# Altium PCB JSB_PCB.PcbDoc
Units mm, origin at the board's own origin, x right, y up, seen from the top; angles counter-clockwise.
Board outline 95.1 x 24.6 mm, 2 copper layers (Top Layer, Bottom Layer), stack 1.671 mm thick; 10 components, 11 nets, 28 pads, 163 vias.
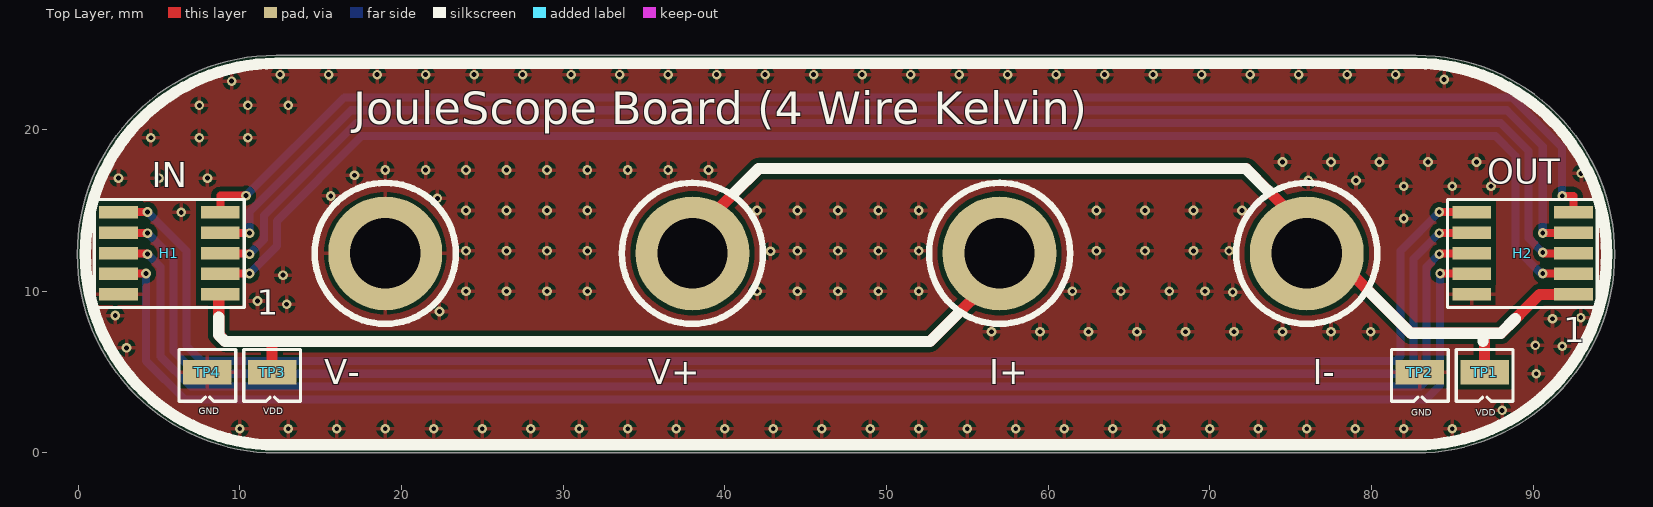
[diagram p0: Top Layer view]
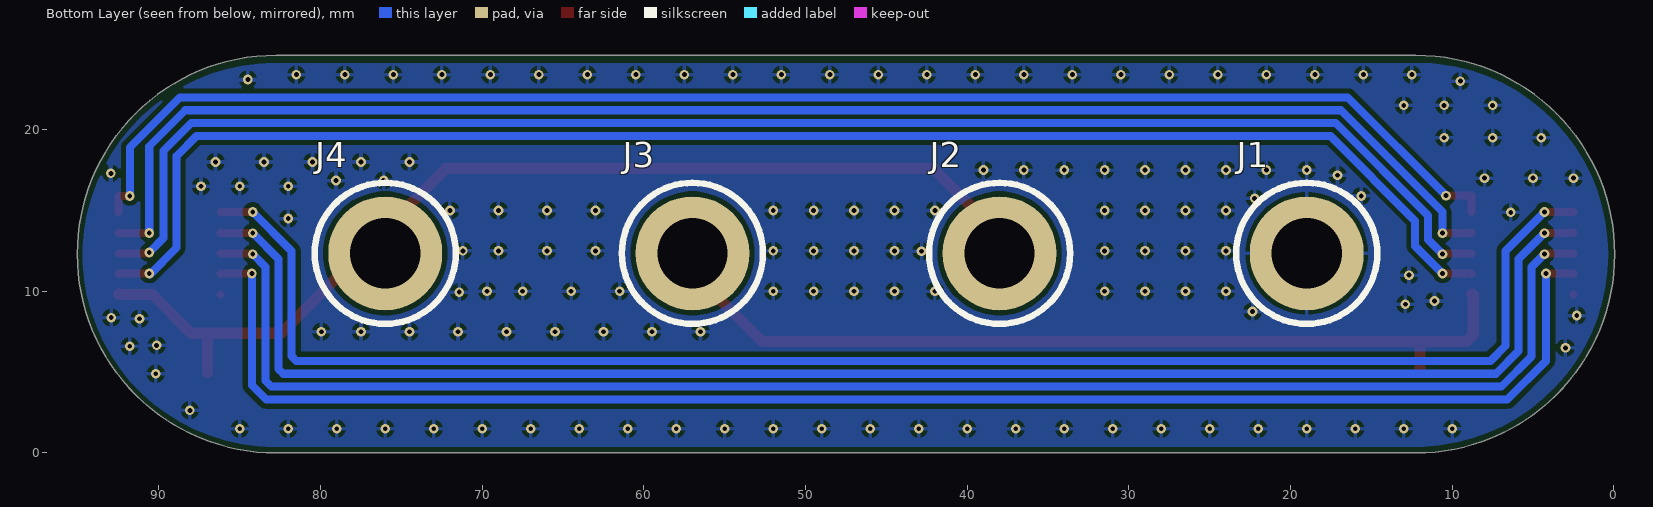
[diagram p1: Bottom Layer view, seen from below]

## Layer stack, top to bottom
Top Solder: solder mask 0.0102, Solder Resist, Dk 3.5
Top Layer: signal copper 0.0356
Dielectric 1: dielectric 1.6, FR-4, Dk 4.8
Bottom Layer: signal copper 0.0356
Bottom Solder: solder mask 0.0102, Solder Resist, Dk 3.5

## Board outline
12.25,0 82.75,0 ccw(c82.75,12.3) 82.75,24.6 12.25,24.6 ccw(c12.25,12.3)

## Design rules (kind name [scope] priority, off if disabled: settings)
Clearance [All] p1: gap=0.3 ignorepadtopadclearanceinfootprint=FALSE
PolygonConnect [All] p1: connectstyle=Relief reliefconductorwidth=0.254 reliefentries=4 polygonreliefangle="90 Angle" airgapwidth=0.254
RoutingVias [All] p1: holewidth=0.3 width=0.6 viastyle="Through Hole" minholewidth=0.3 minwidth=0.6 maxholewidth=0.3 maxwidth=0.6
SilkToSolderMaskClearance [IsPad] p1: minsilkscreentomaskgap=0.1 clearancetoexposedcopper=TRUE
SolderMaskExpansion [All] p1: expansion=0.102 istentingtop=FALSE
Width [All] p1: maxlimit=1 minlimit=0.3 preferedwidth=0.5
29 further rules are at their usual default settings.

## Components (designator, comment, footprint, x,y, rotation, side; value= is the part's Value field where it differs from the comment)
H1 "10pin Header" 20021121 5.65,12.35 r180 top locked
H2 "10pin Header" 20021121 89.35,12.35 r180 top locked
J1 "V-" 654 19,12.35 r180 bottom
J2 "V+" 654 38,12.35 r180 bottom
J3 "I+" 654 57,12.35 r180 bottom locked
J4 "I-" 654 76,12.35 r180 bottom
TP1 "Red TP" 5190TR 87,5 r0 top locked
TP2 "Black TP" 5191TR 83,5 r0 top locked
TP3 "Red TP" 5190TR 12,5 r0 top locked
TP4 "Black TP" 5191TR 8,5 r0 top locked

## Footprints (in the part's own frame and the unit in brackets; to place one, negate y for a bottom-side part, rotate by r counter-clockwise, add the part's x,y. Pads: shape width x height; smd on the part's side, far side on the other; paste and mask are expansions set on the pad)
654 [mm]
  round 7.05 hole 4.35: 1(0,0)
  silkscreen extent -4.36,-4.36 4.36,4.36, body extent -2.81,-3.25 2.73,3.15, height 20.09
5190TR [mm] "RED SMD Test Point"
  rect 3x1.5 smd: 1(0,0)
  silkscreen extent -1.75,-1.8 1.75,1.4, body extent -1.25,-1.47 1.25,1.53, height 2.51
5191TR [mm] "Black SMD Test Point"
  rect 3x1.5 smd: 1(0,0)
  silkscreen extent -1.75,-1.8 1.75,1.4, body extent -1.25,-1.5 1.25,1.5, height 2.51
20021121 [mm] "10 Pin header"
  rect 2.4x0.76 smd: 1(-3.15,2.54) 2(3.15,2.54) 3(-3.15,1.27) 4(3.15,1.27) 5(-3.15,0) 6(3.15,0) 7(-3.15,-1.27) 8(3.15,-1.27) 9(-3.15,-2.54) 10(3.15,-2.54)
  silkscreen extent -4.62,-3.32 4.65,3.35, body extent -2.78,-3.18 2.72,3.18, height 4.56

## Part data
H1 H2: library part 20021121-00010C4LF, "10 Pin Mini Header", Manufacturer="Amphenol ICC / FCI", Supplier Part Number=609-3695-1-ND, Category="Headers and Wire Housings", ComponentLink1Description=https://datasheet.ciiva.com/11749/0900766b8118d62a-11749057.pdf?src-supplier=Rs, ComponentLink1URL=https://datasheet.ciiva.com/11749/0900766b8118d62a-11749057.pdf?src-supplier=Rs, Manufacturer Part Number=20021121-00010C4LF, Pricing="1=0,99, 10=0,839, 100=0,7533 (USD)", RoHS=No, Stock=137144, Supplier=Digi-Key
J1 J2 J3 J4: library part 654, "CONN BANANA PLUG THRD", Manufacturer="Keystone Electronics", Supplier Part Number=36-654-ND, Category=Connectors, ComponentLink1Description=https://datasheet.ciiva.com:443/pdfs/VipMasterIC/IC/KEYC/KEYCS00181/KEYCS00191-1.pdf?src-supplier=IHS+Markit, ComponentLink1URL=https://datasheet.ciiva.com:443/pdfs/VipMasterIC/IC/KEYC/KEYCS00181/KEYCS00191-1.pdf?src-supplier=IHS+Markit, ComponentLink2Description=http://mail.keyelco.com/ENG._DEPT/PDF%20CAT%20NO%20Drawings/654.pdf?src-supplier=Digi-Key, ComponentLink2URL=http://mail.keyelco.com/ENG._DEPT/PDF%20CAT%20NO%20Drawings/654.pdf?src-supplier=Digi-Key, ComponentLink3Description=http://keyelco.com/userAssets/file/M65p110.pdf?src-supplier=Digi-Key, ComponentLink3URL=http://keyelco.com/userAssets/file/M65p110.pdf?src-supplier=Digi-Key, Connector Type="Interconnection Device", Manufacturer Part Number=654, Pricing="1=2,73, 25=2,3996, 100=2,1816, 250=1,98876, 500=1,85436, 1000=1,58166, 2500=1,47258 (USD)", Reach SVHC Compliant=Yes, RoHS=Yes, RoHS Compliant=Yes, Stock=4200, Supplier=Digi-Key
TP1 TP3: library part 5190TR, "RED SMD Test Point", Manufacturer="Keystone Electronics", Supplier Part Number=36-5190CT-ND, Category=Connectors, ComponentLink1Description=https://www.keyelco.com/product-pdf.cfm?p=14478&src-supplier=Digi-Key, ComponentLink1URL=https://www.keyelco.com/product-pdf.cfm?p=14478&src-supplier=Digi-Key, Manufacturer Part Number=5190TR, Pricing="1=0,42, 10=0,401, 25=0,3436, 50=0,292, 100=0,2806, 250=0,25196, 500=0,24052 (USD)", RoHS=Yes, Stock=241676, Supplier=Digi-Key
TP2 TP4: library part 5191TR, "BLACK SMD Test Point", Manufacturer="Keystone Electronics", Supplier Part Number=36-5191CT-ND, Category=Connectors, Manufacturer Part Number=5191TR, Pricing="1=0,42, 10=0,401, 25=0,3436, 50=0,292, 100=0,2806, 250=0,25196, 500=0,24052 (USD)", RoHS=Yes, RoHS Compliant=Yes, Stock=118911, Supplier=Digi-Key

## Via types
v1: diameter 0.6, hole 0.3, Top Layer to Bottom Layer, tented both sides, 163 vias

## Nets (pads, with @x,y where several pads share a name; then routed paths per layer and width w, separated by ;. In a path a pad name is that pad's centre, name@x,y a point inside that pad or via, vN(x,y) a via of type N, cw(c..) or ccw(c..) an arc to the next point about the centre after c; other vN are vias at no path point)
GND: H1.2 H2.2 J1.1 TP2.1 TP4.1 | length 0
  other v1: 10,1.5 13,1.5 16,1.5 19,1.5 22,1.5 25,1.5 28,1.5 31,1.5 34,1.5 37,1.5 40,1.5 43,1.5 46,1.5 49,1.5 52,1.5 55,1.5 58,1.5 61,1.5 64,1.5 67,1.5 70,1.5 73,1.5 76,1.5 79,1.5 82,1.5 85,1.5 88.084,2.637 90.2,4.9 3,6.5 91.8,6.6 90.139,6.657 56.5,7.5 59.5,7.5 62.5,7.5 65.5,7.5 68.5,7.5 71.5,7.5 74.5,7.5 77.5,7.5 79.953,7.5 91.2,8.3 92.953,8.373 2.3,8.5 22.35,8.75 12.9,9.2 11.1,9.4 71.425,9.95 24,10 26.5,10 29,10 31.5,10 42,10 44.5,10 47,10 49.5,10 52,10 61.5,10 64.5,10 67.5,10 69.7,10 12.674,11 42.825,12.475 24,12.5 26.5,12.5 29,12.5 31.5,12.5 44.5,12.5 47,12.5 49.5,12.5 52,12.5 63,12.5 66,12.5 69,12.5 71.2,12.5 82,14.5 6.384,14.885 24,15 26.5,15 29,15 31.5,15 42,15 44.5,15 47,15 49.5,15 52,15 63,15 66,15 69,15 72,15 22.225,15.75 15.625,15.9 82,16.5 85,16.5 87.4,16.5 76.099,16.862 79.049,16.849 2.5,17 5,17 8,17 17.1,17.175 92.973,17.295 19,17.5 21.5,17.5 24,17.5 26.5,17.5 29,17.5 31.5,17.5 34,17.5 36.5,17.5 39,17.5 74.5,18 77.5,18 80.5,18 83.5,18 86.5,18 4.5,19.5 7.5,19.5 10.5,19.5 7.5,21.5 10.5,21.5 13,21.5 9.5,23 84.5,23.1 12.5,23.4 15.5,23.4 18.5,23.4 21.5,23.4 24.5,23.4 27.5,23.4 30.5,23.4 33.5,23.4 36.5,23.4 39.5,23.4 42.5,23.4 45.5,23.4 48.5,23.4 51.5,23.4 54.5,23.4 57.5,23.4 60.5,23.4 63.5,23.4 66.5,23.4 69.5,23.4 72.5,23.4 75.5,23.4 78.5,23.4 81.5,23.4
PTI_DATA: H1.10 H2.10 | length 98.6
  Top Layer w0.5: H1.10 2.505,14.895 4.295,14.895 v1(4.3,14.9) ; v1(84.2,14.9) 84.205,14.895 86.195,14.895 H2.10
  Bottom Layer w0.5: v1(4.3,14.9) 6.7,12.5 6.7,6.631 7.631,5.7 81.507,5.7 81.8,5.993 81.8,12.5 v1(84.2,14.9)
PTI_FRAME: H1.9 H2.9 | length 92.5
  Top Layer w0.5: H1.9 8.8,15.916 v1(10.384,15.916) ; v1(91.8,15.9) 92.5,15.9 H2.9
  Bottom Layer w0.5: v1(10.384,15.916) 16.469,22 16.5,22 88.7,22 91.8,18.9 v1(91.8,15.9)
RST: H1.3 H2.3 | length 95
  Top Layer w0.5: H1.3 8.81,11.09 10.59,11.09 v1(10.6,11.1) ; v1(90.6,11.1) 90.61,11.09 92.49,11.09 H2.3
  Bottom Layer w0.5: v1(10.6,11.1) 12.3,12.8 12.3,14.36 17.54,19.6 87.669,19.6 88.9,18.369 88.9,12.7 v1@90.55,11.05
SWCLK: H1.8 H2.8 | length 98.3
  Top Layer w0.5: H1.8 2.51,13.61 4.29,13.61 v1(4.3,13.6) ; v1(84.2,13.6) 84.21,13.61 86.19,13.61 H2.8
  Bottom Layer w0.5: v1(4.3,13.6) 5.9,12 5.9,6.3 7.3,4.9 82.307,4.9 82.6,5.193 82.6,12 v1(84.2,13.6)
SWDIO: H1.7 H2.7 | length 93.9
  Top Layer w0.5: H1.7 8.81,13.61 10.59,13.61 v1(10.6,13.6) ; v1(90.601,13.601) 90.611,13.611 92.491,13.611 H2.7
  Bottom Layer w0.5: v1(10.6,13.6) 10.6,14.922 11.188,15.51 16.878,21.2 88.369,21.2 90.6,18.969 90.6,13.602 v1(90.601,13.601)
SWO: H1.6 H2.6 | length 97.9
  Top Layer w0.5: H1.6 4.223,12.35 4.273,12.3 v1(4.3,12.3) ; v1(84.2,12.3) 84.227,12.3 84.277,12.35 H2.6
  Bottom Layer w0.5: v1(4.3,12.3) 4.302,12.3 5.1,11.502 5.1,5.969 6.969,4.1 83.031,4.1 83.4,4.469 83.4,11.5 v1(84.2,12.3)
VCOM_RX: H1.4 H2.4 | length 97.4
  Top Layer w0.5: H1.4 2.51,11.09 4.19,11.09 v1(4.2,11.1) ; v1(84.25,11.1) 84.26,11.09 86.19,11.09 H2.4
  Bottom Layer w0.5: v1(4.2,11.1) 4.2,5.7 6.6,3.3 83.363,3.3 84.25,4.187 v1(84.25,11.1)
VCOM_TX: H1.5 H2.5 | length 94.4
  Top Layer w0.5: H1.5 10.523,12.35 10.572,12.301 v1(10.599,12.301) ; v1(90.6,12.4) 90.627,12.4 90.677,12.35 H2.5
  Bottom Layer w0.5: v1(10.599,12.301) 11.5,13.202 11.5,14.691 17.209,20.4 88,20.4 89.709,18.691 89.709,13.291 v1(90.6,12.4)
VS+: H1.1 J3.1 TP3.1 | length 55.6
  Top Layer w0.7: H1.1 8.73,9.81 8.7,9.78 8.7,7.31 9.11,6.9 12,6.9 ; TP3.1 12,6.9 ; J3.1@57.6,11.8 52.7,6.9 12,6.9
VT+: H2.1 J2.1 J4.1 TP1.1 | length 65.7
  Top Layer w0.7: J2.1@36.7,12.2 42.1,17.6 72.25,17.6 77.5,12.35 82.451,7.399 87,7.399 ; TP1.1 87,7.399 ; H2.1 92.47,9.84 92.43,9.8 90.401,9.8 88,7.399 87,7.399

## Polygon pours and split planes (outlines as drawn)
GND on Top Layer "GND_L01_P002" (solid, pour order 2): 12.242,0.4 83.358,0.4 ccw(c82.842,12.251) 83.358,24.102 11.245,24.102 ccw(c12.237,12.272)
GND on Bottom Layer "GND_L02_P003" (solid, pour order 3): 12.242,0.4 83.358,0.4 ccw(c82.842,12.251) 83.358,24.102 11.245,24.102 ccw(c12.237,12.272)

## Silkscreen, mask and mechanical layers (free items; w line width, h text height)
Top Overlay:
  lines w0.7: 8.695,8.4 8.695,7.305 9.1,6.9 52.693,6.9 54.397,8.603 ; 40.575,16.075 42.1,17.6 72.225,17.6 73.612,16.213 ; 79.886,9.961 82.447,7.4 86.9,7.4 ; 86.9,6.9 86.9,7.4 ; 88.897,8.303 87.995,7.4 86.9,7.4 ; 12.25,0.5 cw(c12.25,12.3) 12.25,24.1 82.75,24.1 cw(c82.75,12.3) 82.75,0.5 12.25,0.5
  text "JouleScope Board (4 Wire Kelvin)" at 17.01,20.333 h2
  text "OUT" at 87.169,16.638 h1.52
  text "IN" at 4.557,16.438 h1.52
  text "V-" at 15.23,4.238 h1.52
  text "V+" at 35.23,4.238 h1.52
  text "I+" at 56.357,4.238 h1.52
  text "I-" at 76.357,4.238 h1.52
  text "GND" at 7.467,2.4 h0.4
  text "VDD" at 11.467,2.4 h0.4
  text "GND" at 82.467,2.3 h0.4
  text "VDD" at 86.467,2.3 h0.4
Top Assembly:
  the board outline again, w0.2
Bottom Assembly:
  the board outline again, w0.2
Board Outline:
  the board outline again, w0.2

## Text inside footprints (layer, text, board x,y; h text height)
H1: Top Overlay "1" at 11.054,8.554 h1.52
H2: Top Overlay "1" at 91.854,6.854 h1.52